# Altium PCB Mainboard.pcbdoc
Units mm, origin at the board's own origin, x right, y up, seen from the top; angles counter-clockwise.
Board outline 80.78 x 66.84 mm, 2 copper layers (Top Layer, Bottom Layer); 7 components, 10 nets, 50 pads, 8 vias.
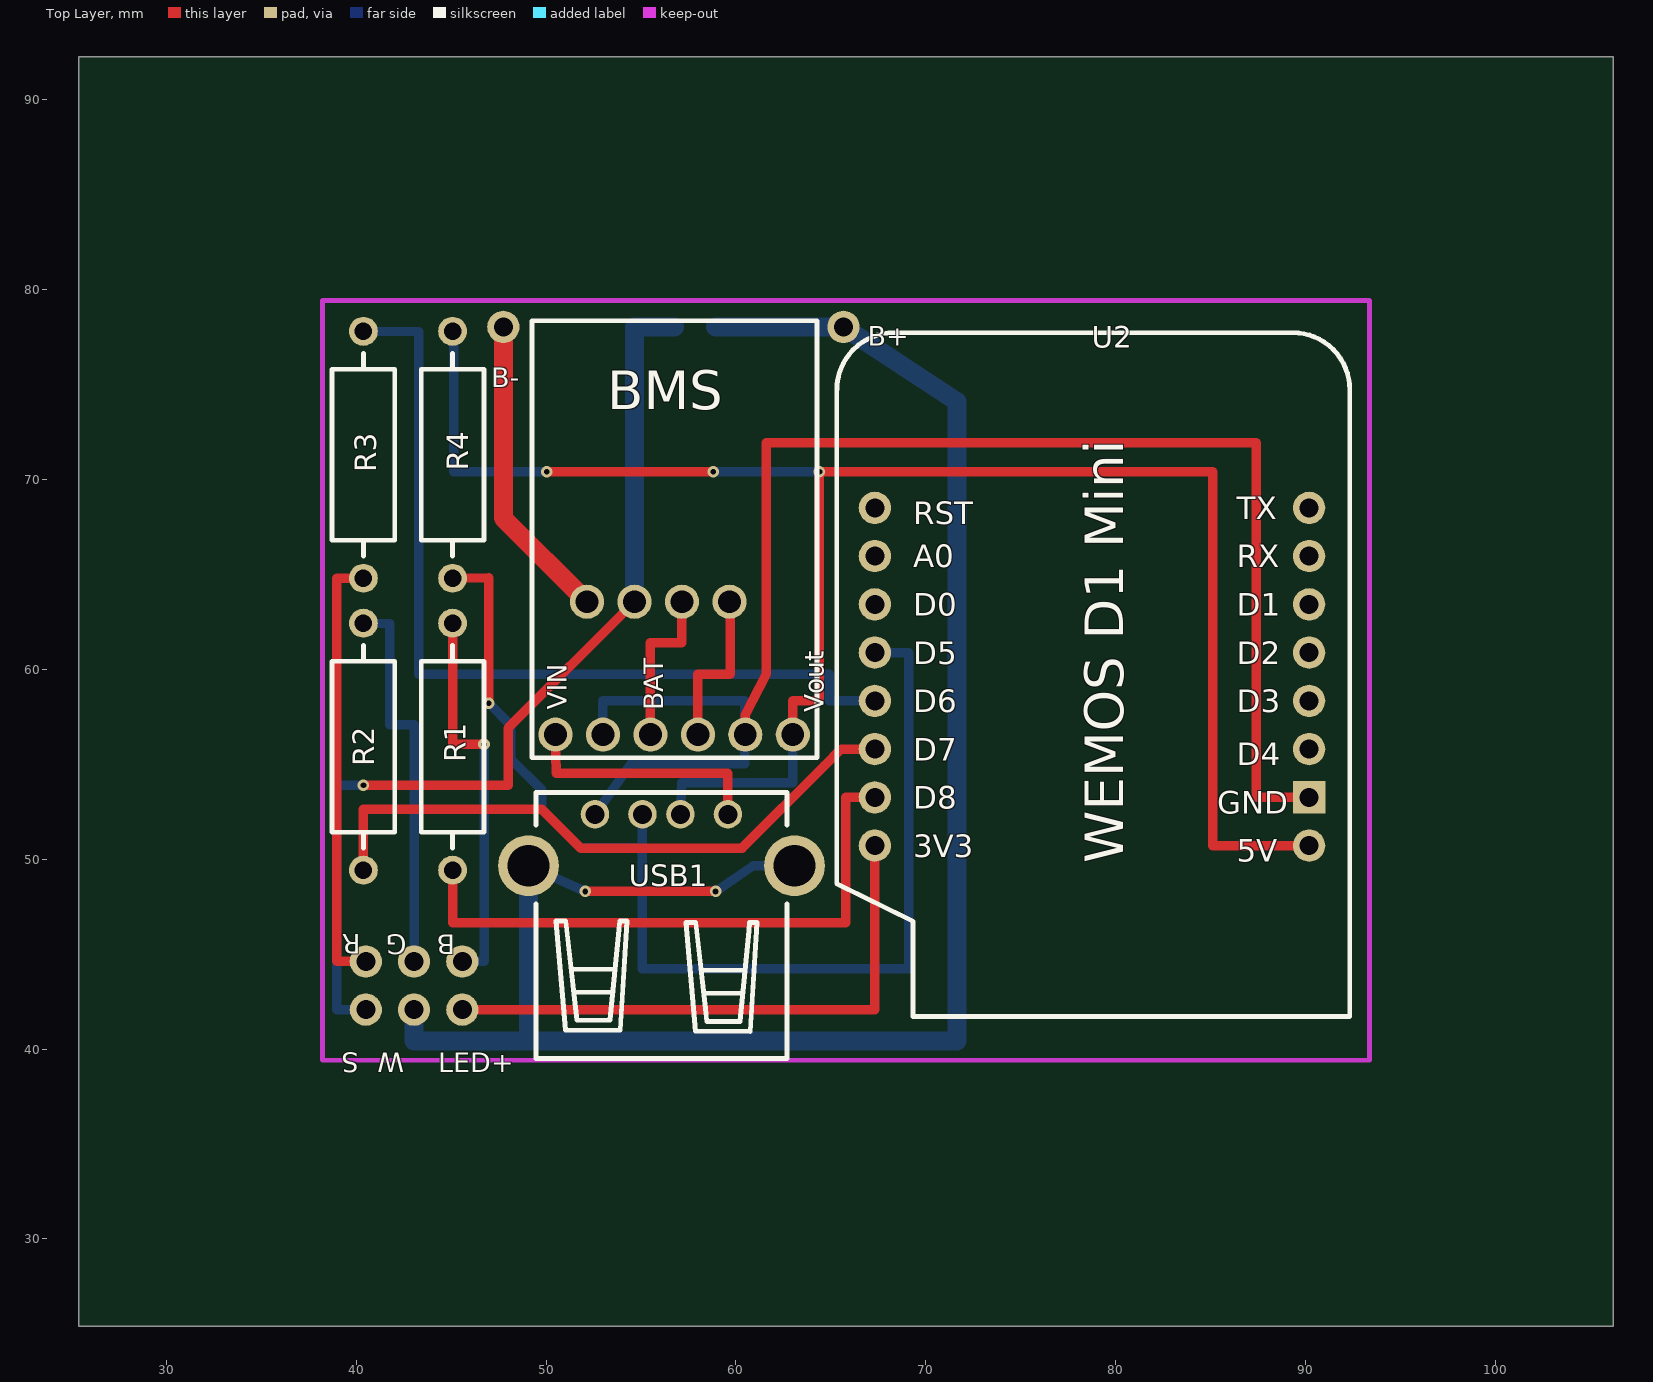
[diagram p0: Top Layer view]
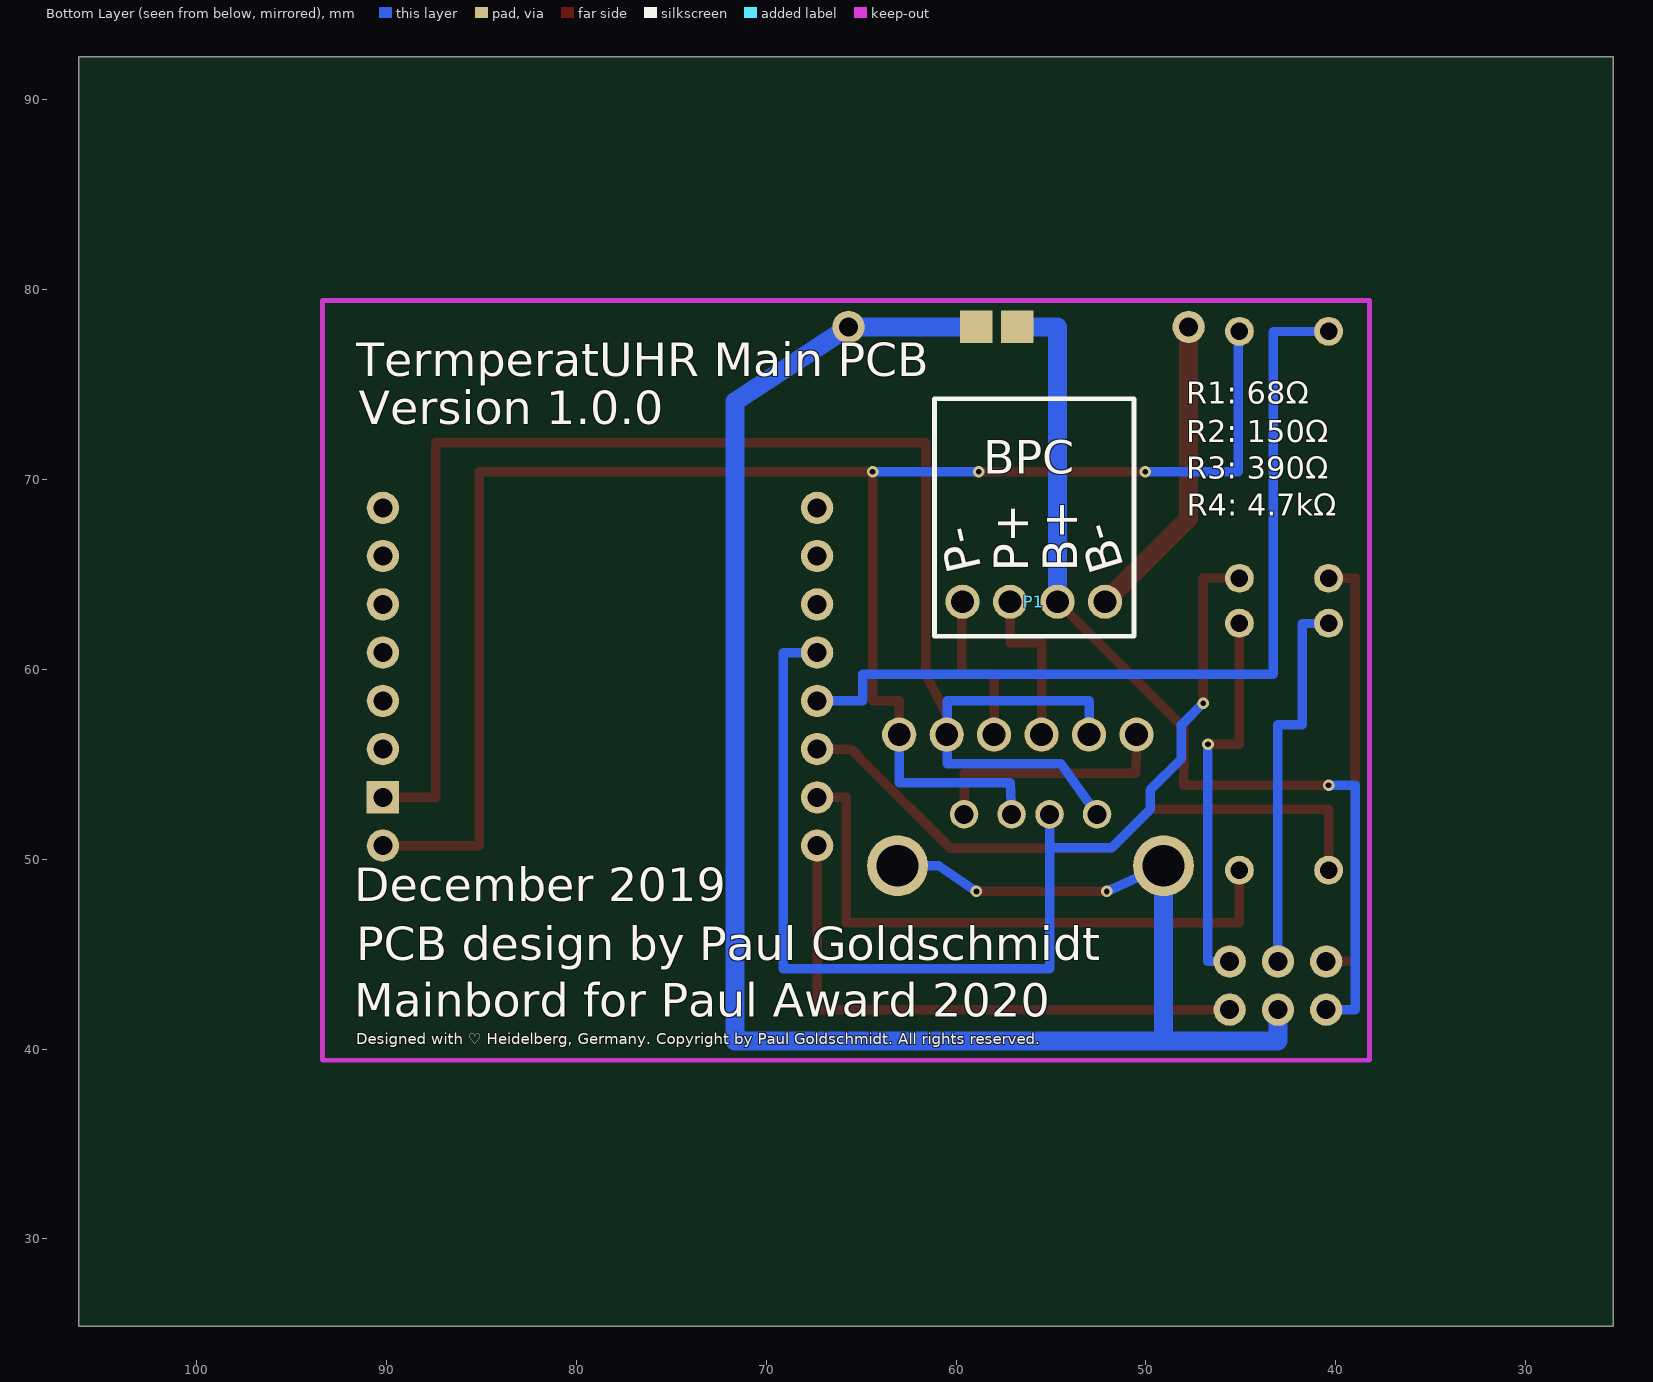
[diagram p1: Bottom Layer view, seen from below]

## Layer stack, top to bottom
Top Layer: signal copper (thickness not stored)
Dielectric: dielectric 0.32, FR-4, Dk 4.8
Bottom Layer: signal copper (thickness not stored)

## Board outline
106.182,25.4 25.4,25.4 25.4,92.236 106.182,92.236

## Components (designator, comment, footprint, x,y, rotation, side; value= is the part's Value field where it differs from the comment)
P1 "DD04CPMA" DD04CPMA 55.88,68.233 r0 bottom
R1 "RES-TH_BD3.3-L9.0-P13.00-D0.6" RES-TH_BD3.3-L9.0-P13.00-D0.6 45.085,55.914 r90 top
R2 "RES-TH_BD3.3-L9.0-P13.00-D0.6" RES-TH_BD3.3-L9.0-P13.00-D0.6 40.386,55.914 r90 top
R3 "RES-TH_BD3.3-L9.0-P13.00-D0.6" RES-TH_BD3.3-L9.0-P13.00-D0.6 40.386,71.281 r90 top
R4 "RES-TH_BD3.3-L9.0-P13.00-D0.6" RES-TH_BD3.3-L9.0-P13.00-D0.6 45.085,71.281 r90 top
U2 "WEMOS_D1_MINI_BOARD" WEMOS_D1_MINI_BOARD 67.31,50.707 r0 top
USB1 "USB-A_4PIN-FEMALE-AF90_MH-PITCH14.00" USB-A_4PIN-FEMALE-AF90_MH-PITCH14.00 56.078,51.002 r0 top

## Footprints (in the part's own frame and the unit in brackets; to place one, negate y for a bottom-side part, rotate by r counter-clockwise, add the part's x,y. Pads: shape width x height; smd on the part's side, far side on the other; paste and mask are expansions set on the pad)
DD04CPMA [mm]
  round 1.8 hole 1.199: 1(3.777,4.689) 2(1.275,4.689) 3(-1.224,4.689) 4(-3.724,4.689)
  silkscreen extent -5.25,-6 5.25,6.5
RES-TH_BD3.3-L9.0-P13.00-D0.6 [mil]
  round 60 hole 36: 1(-255.91,0) 2(255.9,0)
  silkscreen extent -210,-65 210,65
USB-A_4PIN-FEMALE-AF90_MH-PITCH14.00 [mm]
  round 1.5 hole 1: 1(-3.5,1.355) 2(-1,1.355) 3(1,1.355) 4(3.5,1.355)
  round 3.2 hole 2.2: MH1(-7,-1.355) MH2(7,-1.355)
  silkscreen extent -6.6,-11.5 6.6,2.5
WEMOS_D1_MINI_BOARD [mm]
  round 1.7 hole 1: 1(0,17.78) 2(0,15.24) 3(0,12.7) 4(0,10.16) 5(0,7.62) 6(0,5.08) 7(0,2.54) 8(0,0) 9(22.86,0) 11(22.86,5.08) 12(22.86,7.62) 13(22.86,10.16) 14(22.86,12.7) 15(22.86,15.24) 16(22.86,17.78)
  rect 1.7x1.7 hole 1: 10(22.86,2.54)
  silkscreen extent -2.01,-8.99 25,27

## Free pads (board coordinates)
  round 1.7 hole 1: 1(40.513,42.071) 2(40.513,44.611) 2(43.053,42.071) 2(43.053,44.611) 2(45.593,44.611) 2(47.752,78.012) 2(65.659,78.012) 3(45.593,42.071)
  round 1.8 hole 1.199: 1(57.998,56.549) 1(62.992,56.549) 2(55.497,56.549) 2(60.49,56.549) 3(52.997,56.549) 4(50.498,56.549)
  rect 1.7x1.7 smd far side: 5(56.769,78.012) 5(58.928,78.012)

## Via types
v1: diameter 0.61, hole 0.305, Top Layer to Bottom Layer, 8 vias

## Nets (pads, with @x,y where several pads share a name; then routed paths per layer and width w, separated by ;. In a path a pad name is that pad's centre, name@x,y a point inside that pad or via, vN(x,y) a via of type N, cw(c..) or ccw(c..) an arc to the next point about the centre after c; other vN are vias at no path point)
S$3798: P1.2 P1.3 pad.1@40.513,42.071 pad.2@43.053,42.071 pad.2@55.497,56.549 pad.2@65.659,78.012 pad.5 USB1.MH1 USB1.MH2 | length 161.7
  Top Layer w0.5: v1(40.386,53.882) 48.006,53.882 48.006,56.894 P1.3 ; v1(52.07,48.294) v1(58.928,48.294) ; pad.2@55.497,56.549 55.499,61.375 57.155,61.375 P1.2
  Bottom Layer w0.5: v1(40.386,53.882) 38.989,53.882 38.989,42.071 pad.1@40.513,42.071 ; USB1.MH1 v1(52.07,48.294) ; v1(58.928,48.294) 60.917,49.647 USB1.MH2
  Bottom Layer w1: pad.2@43.053,42.071 43.053,40.42 71.628,40.42 71.628,74.075 65.659,78.012 pad.5@58.928,78.012 ; 49.078,40.42 USB1.MH1 ; P1.3 54.655,78.012 pad.5@56.769,78.012
S$3801: P1.1 P1.4 pad.1@57.998,56.549 pad.2@47.752,78.012 | length 25
  Top Layer w0.5: pad.1@57.998,56.549 57.998,59.724 59.69,59.724 59.69,63.544 P1.1
  Top Layer w1: pad.2@47.752,78.012 47.752,74.626 47.752,67.948 P1.4
S$3831: pad.3@45.593,42.071 U2.8 | length 30.4
  Top Layer w0.5: pad.3@45.593,42.071 67.31,42.071 U2.8
S$3834: R1.1 U2.7 | length 31.6
  Top Layer w0.5: R1.1 45.085,46.643 65.786,46.643 65.786,53.247 U2.7
S$3845: pad.2@40.513,44.611 R3.1 R3.2 U2.5 | length 69.4
  Top Layer w0.5: R3.1 38.989,64.781 38.989,44.611 pad.2@40.513,44.611
  Bottom Layer w0.5: R3.2 43.307,77.758 43.307,59.724 64.897,59.724 64.897,58.327 U2.5
S$3871: pad.1@62.992,56.549 pad.4 R4.2 U2.9 USB1.3 USB1.4 | length 110.6
  Top Layer w0.5: v1(50.038,70.392) v1(58.801,70.392) ; pad.4 50.546,54.517 59.563,54.517 USB1.4 ; pad.1@62.992,56.549 62.992,58.327 64.389,58.327 v1(64.389,70.392) 85.09,70.392 85.09,50.707 U2.9
  Bottom Layer w0.5: R4.2 45.145,77.72 45.145,70.392 v1(50.038,70.392) ; USB1.3 57.15,54.009 62.992,54.009 pad.1@62.992,56.549 ; v1(58.801,70.392) v1(64.389,70.392)
S$3874: pad.2@60.49,56.549 pad.3@52.997,56.549 U2.10 USB1.1 | length 84.7
  Top Layer w0.5: pad.2@60.49,56.549 60.49,57.603 61.595,59.724 61.595,71.916 87.376,71.916 87.376,53.247 U2.10
  Bottom Layer w0.5: USB1.1 54.483,55.025 60.452,55.025 60.49,56.549 60.452,56.587 60.452,58.327 52.997,58.327 pad.3@52.997,56.549
S$3911: pad.2@45.593,44.611 R1.2 | length 20.6
  Top Layer w0.5: R1.2 45.085,56.041 v1(46.736,56.041)
  Bottom Layer w0.5: pad.2@45.593,44.611 46.736,44.611 v1(46.736,56.041)
S$3921: pad.2@43.053,44.611 R2.2 | length 20.4
  Bottom Layer w0.5: R2.2 41.783,62.391 41.783,57.057 43.053,57.057 pad.2@43.053,44.611
S$4386: R2.1 R4.1 U2.4 U2.6 USB1.2 | length 95.1
  Top Layer w0.5: R2.1 40.386,52.612 49.784,52.612 51.816,50.58 60.325,50.58 64.643,54.898 65.532,55.787 U2.6 ; R4.1 46.99,64.804 v1(46.99,58.2)
  Bottom Layer w0.5: v1(46.99,58.2) 48.133,57.057 48.133,55.279 49.784,53.628 49.784,52.612 51.79,50.606 55.078,50.606 ; USB1.2 55.078,44.23 69.088,44.23 69.088,60.867 U2.4
pads on no net: U2.1 U2.2 U2.3 U2.11 U2.12 U2.13 U2.14 U2.15 U2.16

## Silkscreen, mask and mechanical layers (free items; w line width, h text height)
Top Overlay:
  lines w0.254: 49.269,55.336 64.269,55.336 64.269,78.336 49.269,78.336 49.269,55.336
  text "B+" at 66.929,77.008 h1.03
  text "B-" at 47.117,74.829 h1.03
  text "BMS" at 53.213,73.679 h2.03
  text "VIN" at 51.1,57.856 h1.02 r90
  text "BAT" at 56.18,57.844 h1.02 r90
  text "Vout" at 64.613,57.735 h1.02 r90
  text "WEMOS D1 Mini" at 80.373,49.79 h2.03 r90
  text "R" at 40.259,46.035 h1.03 r180
  text "G" at 42.672,46.016 h1.03 r180
  text "B" at 45.212,46.016 h1.03 r180
  text "S" at 40.132,39.815 h1.03 r180
  text "W" at 42.545,39.793 h1.03 r180
  text "LED+" at 44.323,38.78 h1.03
Bottom Overlay:
  text "TermperatUHR Main PCB" at 91.567,74.837 h3.03
  text "R1: 68Ω" at 47.878,73.567 h2
  text "Version 1.0.0" at 91.44,72.297 h3.03
  text "R2: 150Ω" at 47.878,71.535 h2
  text "BPC" at 58.578,69.706 h3.03
  text "R3: 390Ω" at 47.879,69.63 h2
  text "R4: 4.7kΩ" at 47.86,67.681 h2
  text "December 2019" at 91.689,47.211 h3.03
  text "PCB design by Paul Goldschmidt" at 91.567,44.103 h3.03
  text "Mainbord for Paul Award 2020" at 91.679,41.132 h3.03
  text "Designed with ♡ Heidelberg, Germany. Copyright by Paul Goldschmidt. All rights reserved." at 91.567,40.039 h1
Document:
  lines w0.003: 65.766,58.792 65.816,58.843

## Text inside footprints (layer, text, board x,y; h text height)
P1: Bottom Overlay "P-" at 58.655,65.312 h1.8 r257; Bottom Overlay "P+" at 56.193,65.11 h1.8 r270; Bottom Overlay "B+" at 53.626,65.11 h1.8 r270; Bottom Overlay "B-" at 51.151,65.373 h1.8 r253
U2: Top Overlay "3V3" at 69.342,50.107 h1.2; Top Overlay "D8" at 69.342,52.647 h1.2; Top Overlay "D7" at 69.342,55.187 h1.2; Top Overlay "D6" at 69.342,57.727 h1.2; Top Overlay "D5" at 69.342,60.267 h1.2; Top Overlay "D0" at 69.342,62.807 h1.2; Top Overlay "A0" at 69.342,65.347 h1.2; Top Overlay "RST" at 69.342,67.633 h1.2; Top Overlay "5V" at 86.36,49.853 h1.2; Top Overlay "GND" at 85.344,52.393 h1.2; Top Overlay "D4" at 86.36,54.933 h1.2; Top Overlay "D3" at 86.36,57.727 h1.2; Top Overlay "D2" at 86.36,60.267 h1.2; Top Overlay "D1" at 86.36,62.807 h1.2; Top Overlay "RX" at 86.36,65.347 h1.2; Top Overlay "TX" at 86.36,67.887 h1.2